# Allegro board BBSOLARCONTROLLER_V3000_IMPROVE_I.brd
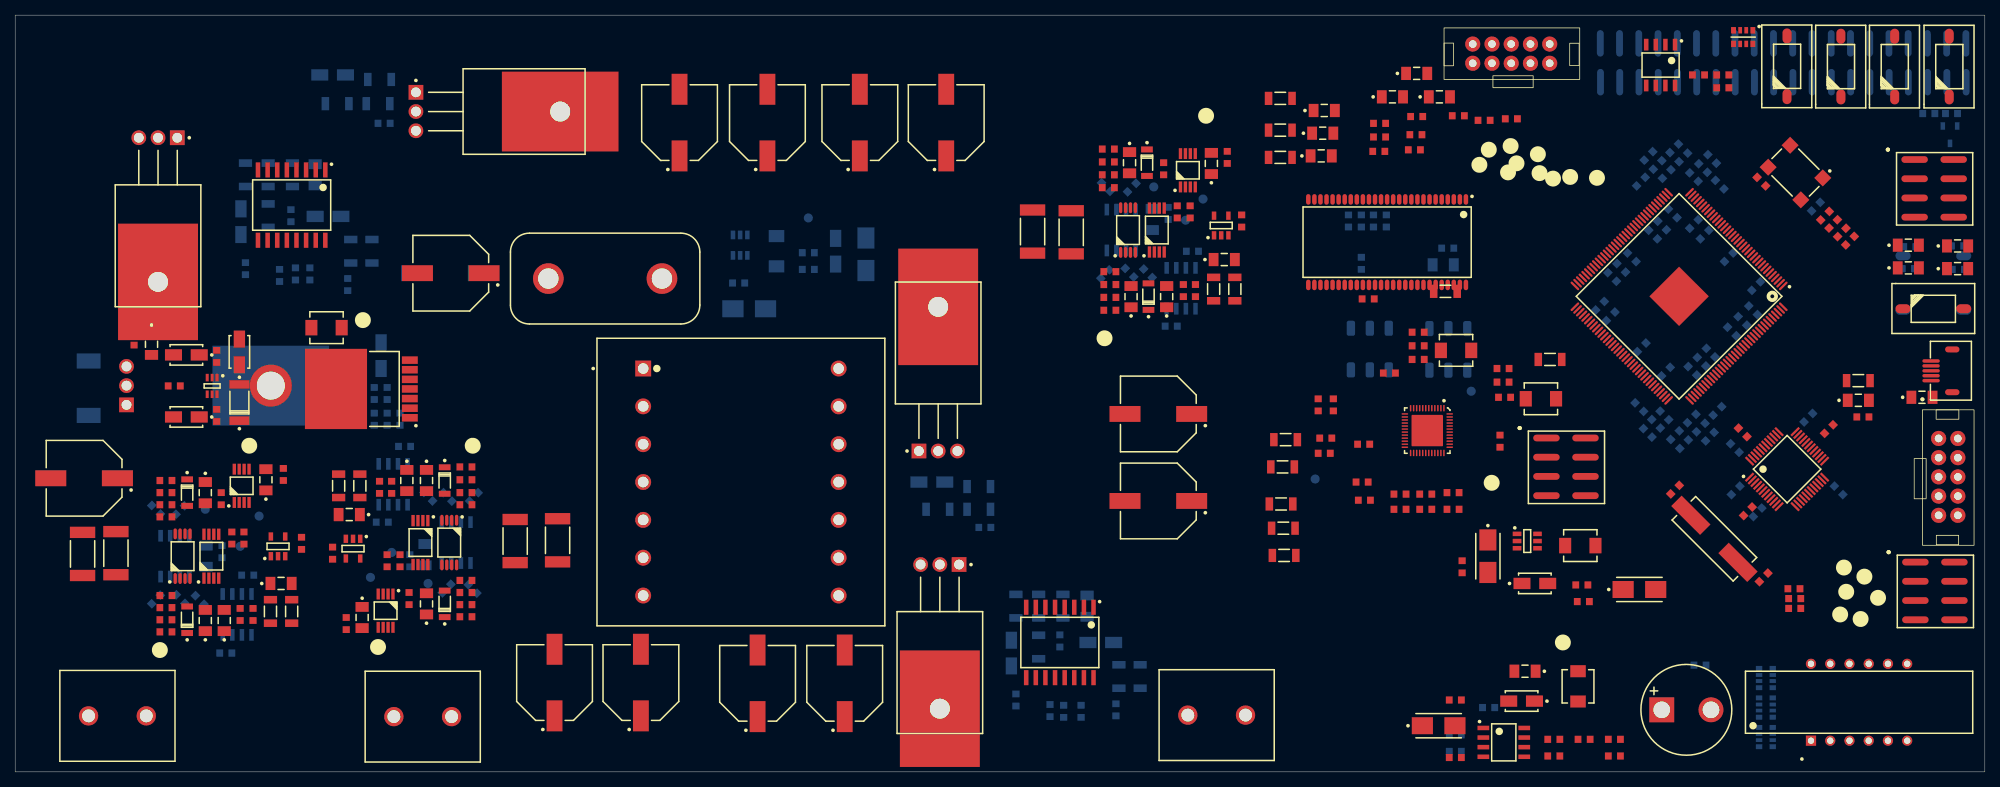
[diagram p0: board, top side]
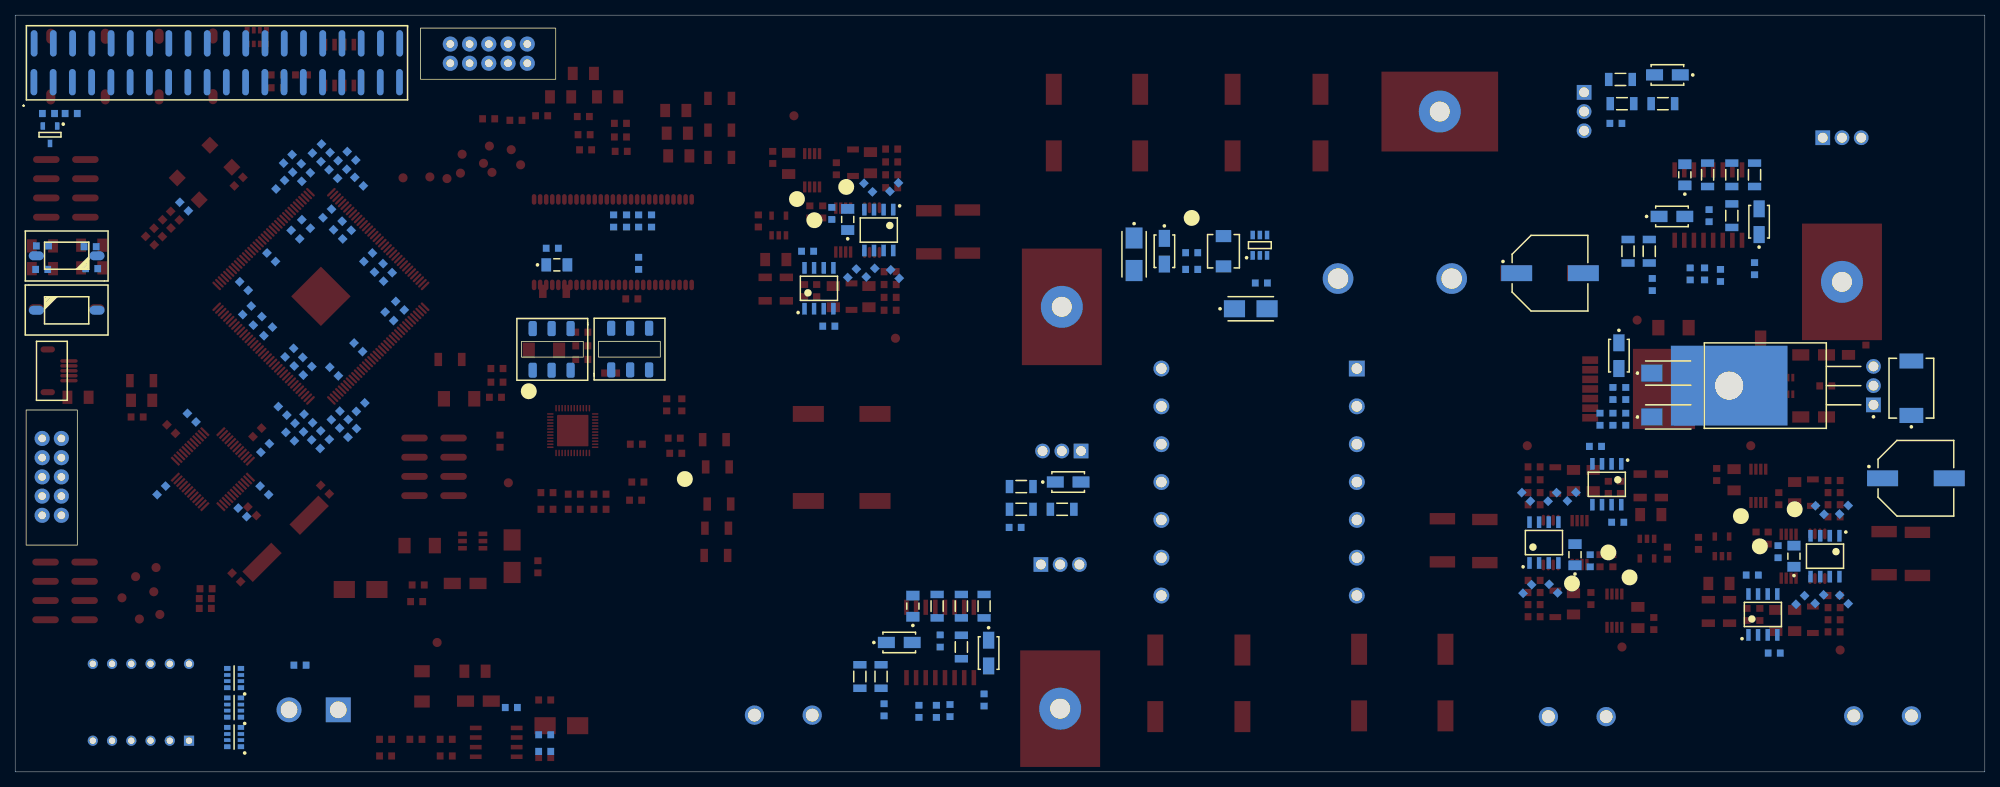
[diagram p1: board, bottom side, seen from below]

Outline 260 x 100 mm; copper layers: TOP, BOTTOM. Coordinates in mm from the lower left corner of the outline.
Outline path: 0,100 260,100 260,0 0,0 0,100

## Design rules (mm)
constraint set DEFAULT: min track width 0.25

## Placement (name value [footprint] x y rotation side)
BUTTON1  KEYA1  [BUTTON_2PIN]  250.2 70 0 bottom
BUTTON2  KEYA2  [BUTTON_2PIN]  256.2 59.2 180 bottom
BUTTON3  ARM_RST  [BUTTON_2PIN]  250.2 59.4 0 top
CA1  22pf  [CAP_NPO_0603]  219.1 37.3 45 top
CA2  22pf  [CAP_NPO_0603]  230.8 25.7 45 top
CA3  10UF  [TCAP_PO_1206]  251.7 49.5 0 top
CA4  10UF  [TCAP_PO_1206]  243.3 49.1 0 top
CA5  0.1uF  [CAP_NPO_0603]  243.9 46.9 180 top
CA6  100nf  [CAP_NPO_0603]  228.72 34.44 45 top
CA7  0.1uF  [CAP_NPO_0603]  236.7 46.8 45 bottom
CA8  0.1uF  [CAP_NPO_0603]  240.7 37.2 315 bottom
CA9  0.1uF  [CAP_NPO_0603]  230 34.3 225 bottom
CA10  4.7uF  [CAP_NPO_0603]  227.1 37.2 225 bottom
CA11  0.1uF  [CAP_NPO_0603]  227 42.8 135 bottom
CAXP1  100u/16V/6032  [TCAP_PO_6032]  194.4 28.5 270 top
CAXP2  1u  [CAP_NPO_0603]  191 27.1 270 top
CAXP3  100u/16V/6032  [TCAP_PO_6032]  214.4 24.1 0 top
CAXP4  10u  [CAP_NPO_0603]  185.2 56.3 0 top
CAXP5  0.22u/0603  [CAP_NPO_0603]  189.8 36.9 0 top
CAXP6  10u/16V/0603  [CAP_NPO_0603]  189.8 34.7 0 top
CAXP7  100n  [CAP_NPO_0603]  185.2 58.1 0 top
CAXP8  2.2u  [CAP_NPO_0603]  185.2 54.5 0 top
CAXP9  4.7u/0603  [CAP_NPO_0603]  186.2 34.7 0 top
CAXP10  4.7u/0603  [CAP_NPO_0603]  182.8 34.7 0 top
CAXP11  2.2u  [CAP_NPO_0603]  196.6 49.5 0 top
CAXP12  10u  [CAP_NPO_0603]  196.4 51.5 0 top
CAXP13  1n  [CAP_NPO_0603]  196.4 53.3 0 top
CAXP14  4.7u  [CAP_NPO_0603]  172 48.5 90 top
CAXP15  1u  [CAP_NPO_0603]  174 48.5 270 top
CAXP16  4.7u  [CAP_NPO_0603]  173 44.1 0 top
CAXP17  4.7u  [CAP_NPO_0603]  178.6 62.5 0 top
CAXP18  4.7u  [CAP_NPO_0603]  172.8 42.1 0 top
CAXP19  1u  [CAP_NPO_0603]  181.4 52.7 0 top
CAXP20  1u  [CAP_NPO_0603]  196 43.7 270 top
CAXP21  1u  [CAP_NPO_0603]  177.8 38.3 0 top
CBAT1  470u/35v  [SMD_AL_CAP_100X102]  57.4 65.9 180 bottom
CBAT2  470u/35v  [SMD_AL_CAP_100X102]  57.5 65.9 180 top
CBS1  1u  [CAP_NPO_0603]  48.1 37.6 270 top
CBS2  1u  [CAP_NPO_0603]  51.4 43.01 0 bottom
CBS3  100n  [CAP_NPO_0603]  49.7 37.6 90 top
CBS4  1u  [CAP_NPO_0603]  48.46 32.99 180 bottom
CBS5  10UF  [TCAP_PO_1206]  51.7 38.5 270 top
CBS6  0.1uF  [TCAP_PO_1206]  54.3 38.5 270 top
CBS7  0.1uF  [TCAP_PO_1206]  54.3 22.2 90 top
CBS8  10n  [CAP_NPO_0603]  41.9 28.9 90 top
CBS9  0.1uF  [TCAP_PO_1206]  44.1 34 180 top
CBS10  10UF  [TCAP_PO_1206]  54.1 28.7 90 bottom
CBS11  10n  [CAP_NPO_0603]  52.1 27.9 270 bottom
CBS12  10n  [CAP_NPO_0603]  43.7 19.6 270 top
CBS13  10UF  [TCAP_PO_1206]  45.8 20.4 270 top
CBS14  100n  [CAP_NPO_0603]  49.1 27.9 270 top
CF1  0.1uF  [CAP_NPO_0603]  213.4 68 315 bottom
CF2  0.1uF  [CAP_NPO_0603]  210.8 65.4 315 bottom
CF3  0.1uF  [CAP_NPO_0603]  216.2 71 315 bottom
CF4  0.1uF  [CAP_NPO_0603]  218.8 73.8 315 bottom
CF5  0.1uF  [CAP_NPO_0603]  223 71 225 bottom
CF6  0.1uF  [CAP_NPO_0603]  226.2 68 225 bottom
CF7  0.1uF  [CAP_NPO_0603]  229.4 61 135 bottom
CF8  0.1uF  [CAP_NPO_0603]  226.6 58.2 135 bottom
CF9  0.1uF  [CAP_NPO_0603]  223.8 55.4 135 bottom
CF10  0.1uF  [CAP_NPO_0603]  222.6 54.2 135 bottom
CF11  0.1uF  [CAP_NPO_0603]  214.7 56.1 45 bottom
CF12  0.1uF  [CAP_NPO_0603]  210.6 60.2 45 bottom
CF13  0.1uF  [CAP_NPO_0603]  212 66.6 315 bottom
CF14  0.1uF  [CAP_NPO_0603]  217.4 72.2 315 bottom
CF15  0.1uF  [CAP_NPO_0603]  221.6 72.4 225 bottom
CF16  0.1uF  [CAP_NPO_0603]  229.8 64.2 45 bottom
CF17  0.1uF  [CAP_NPO_0603]  228 59.6 135 bottom
CF18  0.1uF  [CAP_NPO_0603]  221.4 53 135 bottom
CF19  0.1uF  [CAP_NPO_0603]  217.9 52.9 45 bottom
CF20  0.1uF  [CAP_NPO_0603]  209.2 61.6 45 bottom
CF21  10UF  [TCAP_PO_1206]  181.8 89.2 0 top
CF22  0.1uF  [CAP_NPO_0603]  185 86.6 0 top
CF23  10UF  [TCAP_PO_1206]  185 92.3 0 top
CF24  0.1uF  [CAP_NPO_0603]  184.7 82.2 0 top
CF25  0.1uF  [CAP_NPO_0603]  184.9 84.2 0 top
CF26  0.1uF  [CAP_NPO_0603]  189.1 69.2 0 bottom
CF27  10UF  [TCAP_PO_1206]  188 89.2 0 top
CF28  10UF  [TCAP_PO_1206]  188.5 67 180 bottom
CF29  0.1uF  [CAP_NPO_0603]  215.6 81.4 45 bottom
CF30  0.1uF  [CAP_NPO_0603]  218 79 45 bottom
CF31  0.01uf  [CAP_NPO_0603]  216.8 80.2 45 bottom
CF32  0.1uF  [CAP_NPO_0603]  224 81 135 bottom
CF33  0.1uF  [CAP_NPO_0603]  222.8 79.8 135 bottom
CF34  0.01uf  [CAP_NPO_0603]  221.6 78.6 135 bottom
CF35  0.1uF  [CAP_NPO_0603]  242.2 70.2 45 top
CF36  0.1uF  [CAP_NPO_0603]  238.9 73.5 45 top
CF37  0.01uf  [CAP_NPO_0603]  237.7 74.7 45 bottom
CF38  0.1uF  [CAP_NPO_0603]  223.7 44.3 225 bottom
CF39  0.1uF  [CAP_NPO_0603]  222.5 45.5 225 bottom
CF40  0.01uf  [CAP_NPO_0603]  221.3 46.7 225 bottom
CF41  0.1uF  [CAP_NPO_0603]  215.5 44.8 315 bottom
CF42  0.1uF  [CAP_NPO_0603]  216.6 46 315 bottom
CF43  0.01uf  [CAP_NPO_0603]  217.7 47.1 315 bottom
CID1  10u  [TCAP_PO_1206]  18 56.5 270 top
CID2  100n  [CAP_NPO_0603]  15.7 57.2 270 top
CLOAD1  470u/35v  [SMD_AL_CAP_100X102]  150.9 47.3 180 top
CLOAD2  470u/35v  [SMD_AL_CAP_100X102]  150.9 35.8 180 top
CLS1  1u  [CAP_NPO_0603]  155.8 63.6 270 top
CLS2  100n  [CAP_NPO_0603]  154.2 63.6 90 top
CLS3  1u  [CAP_NPO_0603]  152.6 58.9 180 bottom
CLS4  10UF  [TCAP_PO_1206]  152 62.8 90 top
CLS5  1u  [CAP_NPO_0603]  155.4 68.8 0 bottom
CLS6  0.1uF  [TCAP_PO_1206]  147.3 62.8 90 top
CLS7  0.1uF  [TCAP_PO_1206]  147.1 80.5 270 top
CLS8  10n  [CAP_NPO_0603]  161.9 72.8 270 top
CLS9  0.1uF  [TCAP_PO_1206]  159.6 67.7 0 top
CLS10  10UF  [TCAP_PO_1206]  150.1 73 90 bottom
CLS11  10n  [CAP_NPO_0603]  152.2 73.8 270 bottom
CLS12  10n  [CAP_NPO_0603]  160 81.2 90 top
CLS13  10UF  [TCAP_PO_1206]  157.9 80.4 90 top
CLS14  100n  [CAP_NPO_0603]  155.1 74 90 top
CMDA1  10u/35V/6032  [TCAP_PO_6032]  96.9 61.2 180 bottom
CMDA2  0.1u/50V/0603  [CAP_NPO_0603]  95.5 64.6 180 bottom
CMDA3  10u/35V/6032  [TCAP_PO_6032]  112.3 68.4 270 bottom
CMDB1  100u/6032  [TCAP_PO_6032]  41.8 46.9 180 bottom
CMDB2  0.1u/50V/0603  [CAP_NPO_0603]  39.5 49.8 180 bottom
CMDB3  100u/6032  [TCAP_PO_6032]  41.8 52.7 180 bottom
CMDB4  0.047u  [CAP_NPO_0603]  47.4 46.6 90 bottom
CMDB5  0.0047u  [CAP_NPO_0603]  50.8 46.6 270 bottom
CMDR_B1  0.22u  [TCAP_PO_1206]  141.5 21.9 90 bottom
CMDR_B2  0.22u  [RCL_COM_1206]  138.3 21.9 270 bottom
CMDR_B3  100n  [CAP_NPO_0603]  145.3 8.2 270 bottom
CMDR_B4  100n  [CAP_NPO_0603]  132.1 9.5 270 bottom
CMDR_F1  0.22u  [TCAP_PO_1206]  39.6 78.9 90 bottom
CMDR_F2  0.22u  [RCL_COM_1206]  36.6 78.9 270 bottom
CMDR_F3  100n  [CAP_NPO_0603]  43.9 64.4 270 bottom
CMDR_F4  100n  [CAP_NPO_0603]  30.4 66.5 270 bottom
CP1  0.1uF/0603  [CAP_NPO_0603]  194.5 8.5 180 bottom
CP2  47uF/1206  [TCAP_PO_1206]  199.3 13.3 180 top
CP3  0.01uF/0603  [CAP_NPO_0603]  203.1 2.1 0 top
CP4  27pF/0603  [CAP_NPO_0603]  203.1 4.3 0 top
CP5  10u/35V/6032  [TCAP_PO_6032]  187.9 6.1 0 top
CP6  0.1uF/50V/0603  [CAP_NPO_0603]  190.1 9.5 0 top
CP7  0.015uF/0603  [CAP_NPO_0603]  190.1 1.9 180 top
CPV1  220u/50v  [SMD_AL_CAP_100X102]  9.1 38.8 180 bottom
CPV2  220u/50v  [SMD_AL_CAP_100X102]  9.1 38.8 180 top
CPVS1  1u  [CAP_NPO_0603]  31.4 20.8 90 top
CPVS2  100n  [CAP_NPO_0603]  29.7 20.8 270 top
CPVS3  1u  [CAP_NPO_0603]  27.8 15.7 180 bottom
CPVS4  10UF  [TCAP_PO_1206]  27.6 20 90 top
CPVS5  1u  [CAP_NPO_0603]  30.7 26 0 bottom
CPVS6  0.1uF  [TCAP_PO_1206]  25.1 20 90 top
CPVS7  0.1uF  [TCAP_PO_1206]  25.1 36.9 270 top
CPVS8  10n  [CAP_NPO_0603]  37.8 30.2 270 top
CPVS9  10UF  [TCAP_PO_1206]  35.1 24.9 0 top
CPVS10  10UF  [TCAP_PO_1206]  25.2 28.5 90 bottom
CPVS11  10n  [CAP_NPO_0603]  27.3 29.1 270 bottom
CPVS12  10n  [CAP_NPO_0603]  35.4 39.3 270 top
CPVS13  10UF  [TCAP_PO_1206]  33.1 38.6 90 top
CPVS14  100n  [CAP_NPO_0603]  30.2 30.9 270 top
CTR_B1  470u/35v  [SMD_AL_CAP_100X102]  111.5 85.8 90 top
CTR_B2  470u/35v  [SMD_AL_CAP_100X102]  122.9 85.8 90 top
CTR_B3  470u/35v  [SMD_AL_CAP_100X102]  109.5 11.7 90 top
CTR_B4  470u/35v  [SMD_AL_CAP_100X102]  98 11.7 90 top
CTR_F1  470u/35v  [SMD_AL_CAP_100X102]  87.7 85.8 90 top
CTR_F2  470u/35v  [SMD_AL_CAP_100X102]  99.3 85.8 90 top
CTR_F3  470u/35v  [SMD_AL_CAP_100X102]  82.6 11.8 90 top
CTR_F4  470u/35v  [SMD_AL_CAP_100X102]  71.2 11.8 90 top
DAXP1  B340A/SMA  [DIODE_SMA]  200.6 24.9 0 top
DBS1  1N4733  [SMA_1N4733_350_145]  56.7 38.5 270 top
DBS2  1N4733  [SMA_1N4733_350_145]  56.7 22.2 90 top
DID1  B340A  [DIODE_SMA]  22.6 46.9 180 top
DID2  B340A  [DIODE_SMA]  22.6 55.1 180 top
DID3  1N4744A  [SMA_1N4733_520_270]  29.6 48.8 90 top
DID4  B340A  [DIODE_SMA]  29.6 55.5 90 top
DID5  MBR2045  [DIODE_SMC]  9.7 50.7 90 bottom
DLA1  LED  [TCAP_PO_1206]  256.4 69.5 0 top
DLA2  LED  [TCAP_PO_1206]  256.4 66.5 0 top
DLF1  LED  [TCAP_PO_1206]  249.9 69.6 0 top
DLF2  LED  [TCAP_PO_1206]  249.9 66.6 0 top
DLS1  1N4733  [SMA_1N4733_350_145]  149.6 62.8 90 top
DLS2  1N4733  [SMA_1N4733_350_145]  149.4 80.5 270 top
DMDA1  B340A/SMA  [DIODE_SMA]  108.3 68.8 270 bottom
DMDB1  B340A/SMA  [DIODE_SMA]  48.3 55 270 bottom
DMDR_B1  B340A  [DIODE_SMA]  143.3 17.1 180 bottom
DMDR_F1  B340A  [DIODE_SMA]  41.3 73.4 180 bottom
DP1  B340A/SMA  [DIODE_SMA]  198.85 9.35 180 top
DPVS1  1N4733  [SMA_1N4733_350_145]  22.7 20.1 90 top
DPVS2  1N4733  [SMA_1N4733_350_145]  22.7 36.9 270 top
DTR_B1  B340A  [DIODE_SMA]  131.5 15.7 270 bottom
DTR_B2  B340A  [DIODE_SMA]  121 38.3 180 bottom
DTR_F1  B340A  [DIODE_SMA]  29.8 72.7 90 bottom
DTR_F2  B340A  [DIODE_SMA]  41.9 92.1 0 bottom
FB1  1uH  [RCL_COM_1206]  33.7 21.2 90 top
FB2  1uH  [RCL_COM_1206]  45.5 37.8 270 top
FB3  1uH  [RCL_COM_1206]  158.2 63.8 90 top
FB4  1uH  [RCL_COM_1206]  243.3 51.7 0 top
FB5  1uH  [RCL_COM_1206]  167 81.2 0 top
FB6  1uH  [RCL_COM_1206]  167 84.8 0 top
FB7  1uH  [RCL_COM_1206]  167 89 0 top
FB8  1u  [RCL_COM_1206]  44.3 68.8 270 bottom
FB9  1u  [RCL_COM_1206]  145.7 12.6 270 bottom
J1  ARM_JTAG  [JTAG_10PIN_DIP]  253.9 33.9 0 top
J2  MICRO USB  [MICROUSB]  258.3 49.3 90 top
J3  ARM_EXTEN_PIN  [SMD_8PIN_JACK]  252.1 20.1 0 top
J4  AXP_ENTEN_LDO  [SMD_8PIN_JACK]  203.4 36.5 0 top
J5  PV  [PV_BAT_LOAD_CONNECTOR_2P_762]  13.5 7.4 0 top
J6  Load  [PV_BAT_LOAD_CONNECTOR_2P_762]  158.6 7.5 0 top
J7  Bat  [PV_BAT_LOAD_CONNECTOR_2P_762]  53.8 7.3 0 top
J8  PROGRAM_SET  [SMD_40PIN_JACK]  257.5 95 270 bottom
J9  FPGA_JTAG  [JTAG_10PIN_DIP]  202.56 93.64 90 top
J10  FPGA_EXTEN_PIN  [SMD_8PIN_JACK]  252 73.3 0 top
KEYF1  BUTTON  [BUTTON_2PIN]  235.69 90.24 90 top
KEYF2  BUTTON  [BUTTON_2PIN]  249.9 90.2 90 top
KEYF3  BUTTON  [BUTTON_2PIN]  242.8 90.2 90 top
KEYF4  BUTTON  [BUTTON_2PIN]  257.1 90.2 90 top
LAXP1  2.2u/0420  [INDUCTOR_0420_H2]  206.6 29.9 0 top
LAXP2  4.7u/0420  [INDUCTOR_0420_H2]  190.2 55.7 0 top
LAXP3  2.2u/0420  [INDUCTOR_0420_H2]  201.4 49.3 0 top
LED1.2V1  LED  [TCAP_PO_1206]  172.4 81.4 0 top
LED2.5V1  LED  [TCAP_PO_1206]  172.6 84.4 0 top
LED3.3V1  LED  [TCAP_PO_1206]  172.8 87.4 0 top
LF1  47nH  [CAP_NPO_0603]  214.6 78 45 bottom
LF2  47nH  [CAP_NPO_0603]  225 77.6 135 bottom
LF3  47nH  [CAP_NPO_0603]  219 82.4 225 bottom
LF4  47nH  [CAP_NPO_0603]  220.2 81.2 45 bottom
LF5  47nH  [CAP_NPO_0603]  240 71.3 135 top
LF6  47nH  [CAP_NPO_0603]  224.7 47.7 225 bottom
LF7  47nH  [CAP_NPO_0603]  214.4 48.2 315 bottom
LF8  47nH  [CAP_NPO_0603]  241.1 72.4 135 top
LF9  47nH  [CAP_NPO_0603]  220.3 43.3 45 bottom
LF10  47nH  [CAP_NPO_0603]  219.1 44.5 225 bottom
LMDA1  4.7u/0420  [INDUCTOR_0420_H2]  100.5 68.8 270 bottom
LMDB1  4.7u/0420  [INDUCTOR_0420_H2]  41.1 58.7 0 top
LP1  15uH/0420  [INDUCTOR_0420_H2]  206.3 11.3 90 top
MB1  IRF3205  [IRF3205_TO220AB-3P]  124.6 27.4 270 top
MB2  IRF3205  [IRF3205_TO220AB-3P]  119.3 42.4 90 top
MF1  IRF3205  [IRF3205_TO220AB-3P]  21.4 83.8 270 top
MF2  IRF3205  [IRF3205_TO220AB-3P]  52.9 89.8 0 top
MID1  IRF3207  [IRF3205_TO220AB-3P#2]  14.7 48.5 0 bottom
P1  EP4CE6E144  [EP4CE6E144QFP-145N]  219.64 62.84 225 top
PV_BAT_L1  15u  [INDUCTOR_ROUND_250_150_120-2N]  77.88 65.19 0 top
QF1  8050  [SS8050_SOT23-3-3N]  255.4 84.2 270 bottom
RA1  2.2k  [CAP_NPO_0603]  234.8 24.2 0 top
RA2  2.2k  [CAP_NPO_0603]  234.9 22.9 0 top
RA3  2.2k  [CAP_NPO_0603]  234.9 21.6 0 top
RA4  1.5K  [CAP_NPO_0603]  239.4 45.3 225 top
RA5  10k  [CAP_NPO_0603]  228.04 44.86 315 top
RBS1  100K  [CAP_NPO_0603]  59.5 36.9 180 top
RBS2  100K  [CAP_NPO_0603]  59.5 23.7 180 top
RBS3  10k  [CAP_NPO_0603]  59.5 35.3 180 top
RBS4  10K/0603/LowPPM  [CAP_NPO_0603]  59.5 40.3 180 top
RBS5  10k  [CAP_NPO_0603]  59.5 25.3 0 top
RBS6  100K/0603/LowPPM  [CAP_NPO_0603]  59.5 38.6 180 top
RBS7  100K/0603/LowPPM  [CAP_NPO_0603]  59.5 22.1 180 top
RBS8  10K/0603/LowPPM  [CAP_NPO_0603]  59.5 20.5 180 top
RBS9  SC_AMP  [CAP_NPO_0603]  52 22.9 90 top
RBS10  REF_EN  [CAP_NPO_0603]  60.55 36.34 225 bottom
RBS11  REF_VCC  [CAP_NPO_0603]  57.09 36.33 315 bottom
RBS12  REF_GND  [CAP_NPO_0603]  60.39 24.17 135 bottom
RBS13  REF_EN  [CAP_NPO_0603]  56.95 24.22 225 bottom
RBS14  SC_IC  [CAP_NPO_0603]  54.54 36.36 315 bottom
RBS15  AD_BAT_GND  [RCL_COM_1206]  42.7 37.8 270 top
RBS16  6.8K  [CAP_NPO_0603]  50.8 27.9 270 top
RBS17  0.01  [SAMPLE_RESISTOR_2512]  66 30.5 270 top
RBS18  0.01  [SAMPLE_RESISTOR_2512]  71.6 30.6 270 top
RF1  1k  [CAP_NPO_0603]  256.4 69.5 180 bottom
RF2  1k  [CAP_NPO_0603]  256.5 66.4 180 bottom
RF3  4.7K  [CAP_NPO_0603]  222.2 92.1 0 top
RF4  4.7K  [CAP_NPO_0603]  225.4 90.4 180 top
RF5  4.7K  [CAP_NPO_0603]  225.4 92.1 180 top
RF6  2K  [CAP_NPO_0603]  255.6 87 0 bottom
RF7  100  [CAP_NPO_0603]  252.6 87 0 bottom
RF8  4.7K  [CAP_NPO_0603]  190.5 86.7 0 top
RF9  4.7K  [CAP_NPO_0603]  193.9 86.1 0 top
RF10  10k  [CAP_NPO_0603]  180.1 85.7 0 top
RF11  4.7K  [CAP_NPO_0603]  197.5 86.3 0 top
RF12  7.57K  [CAP_NPO_0603]  180.1 83.9 0 top
RF13  3.63K  [CAP_NPO_0603]  180 82 0 top
RF14  4.7K  [CAP_NPO_0603]  177.7 67.2 270 bottom
RF15  4.7K  [CAP_NPO_0603]  176 72.8 90 bottom
RF16  4.7K  [CAP_NPO_0603]  181 72.8 90 bottom
RF17  4.7K  [CAP_NPO_0603]  179.3 72.8 90 bottom
RF18  4.7K  [CAP_NPO_0603]  177.7 72.8 90 bottom
RF19  100  [CAP_NPO_0603]  222.4 14.1 0 bottom
RF20  1k  [CAP_NPO_0603]  249.9 66.5 180 bottom
RF21  1k  [CAP_NPO_0603]  250.1 69.4 180 bottom
RF22  22  [CAP_NPO_0603]  230.5 78 315 top
RID1  200  [CAP_NPO_0603]  26.6 47.1 270 top
RID2  2K  [CAP_NPO_0603]  21 51 0 top
RID3  200  [CAP_NPO_0603]  26.6 54.9 90 top
RLS1  100K  [CAP_NPO_0603]  144.5 64.4 0 top
RLS2  100K  [CAP_NPO_0603]  144.3 78.9 0 top
RLS3  10k  [CAP_NPO_0603]  144.5 66.1 0 top
RLS4  10k  [CAP_NPO_0603]  144.3 77.2 180 top
RLS5  10K/0603/LowPPM  [CAP_NPO_0603]  144.5 61 0 top
RLS6  100K/0603/LowPPM  [CAP_NPO_0603]  144.5 62.7 0 top
RLS7  100K/0603/LowPPM  [CAP_NPO_0603]  144.3 80.6 0 top
RLS8  10K/0603/LowPPM  [CAP_NPO_0603]  144.3 82.3 0 top
RLS9  SC_AMP  [CAP_NPO_0603]  151.6 79.7 270 top
RLS10  REF_EN  [CAP_NPO_0603]  143.87 65.78 45 bottom
RLS11  REF_VCC  [CAP_NPO_0603]  147.09 65.97 135 bottom
RLS12  REF_GND  [CAP_NPO_0603]  143.97 77.28 315 bottom
RLS13  REF_EN  [CAP_NPO_0603]  147.4 77.21 45 bottom
RLS14  SC_IC  [CAP_NPO_0603]  149.52 65.89 135 bottom
RLS15  AD_LOAD_GND  [RCL_COM_1206]  161 63.8 90 top
RLS16  6.8K  [CAP_NPO_0603]  153.4 74 90 top
RLS17  0.01  [SAMPLE_RESISTOR_2512]  134.3 71.4 90 top
RLS18  0.01  [SAMPLE_RESISTOR_2512]  139.4 71.3 90 top
RMDA1  100k/0603  [CAP_NPO_0603]  104.7 68.6 0 bottom
RMDA2  4k/0603  [CAP_NPO_0603]  104.7 66.4 180 bottom
RMDB1  56k/0603/1%  [CAP_NPO_0603]  47.4 50 90 bottom
RMDB2  2k/0603/1%  [CAP_NPO_0603]  49.1 50 270 bottom
RMDB3  2K  [CAP_NPO_0603]  49.1 46.6 90 bottom
RMDR_B1  4.7  [CAP_NPO_0603]  137.9 17.3 90 bottom
RMDR_B2  4.7  [CAP_NPO_0603]  136.6 8.1 90 bottom
RMDR_B3  4.7  [CAP_NPO_0603]  138.4 8 90 bottom
RMDR_B4  4.7  [CAP_NPO_0603]  140.7 8 90 bottom
RMDR_B5  GND_MDR_B  [RCL_COM_1206]  148.5 12.6 270 bottom
RMDR_B6  4.7  [CAP_NPO_0603]  128 32.3 0 bottom
RMDR_F1  4.7  [CAP_NPO_0603]  36.4 73.5 90 bottom
RMDR_F2  4.7  [CAP_NPO_0603]  34.9 65.6 90 bottom
RMDR_F3  4.7  [CAP_NPO_0603]  37 65.8 90 bottom
RMDR_F4  4.7  [CAP_NPO_0603]  38.9 65.8 90 bottom
RMDR_F5  GND_MDR_F  [RCL_COM_1206]  47.1 68.8 270 bottom
RMDR_F6  4.7  [CAP_NPO_0603]  48.7 85.7 180 bottom
RP1  10K/0603  [CAP_NPO_0603]  211.1 2.1 180 top
RP2  1.5K/0603  [CAP_NPO_0603]  211.1 4.3 0 top
RP3  50K/0603  [CAP_NPO_0603]  190.1 4.9 0 bottom
RP4  1K/0603  [CAP_NPO_0603]  190.1 2.7 180 bottom
RP5  20K/0603  [CAP_NPO_0603]  207.1 4.3 0 top
RPKEY1  KEY_1K  [RP_RESISTOR_ARRAY_0603-8N]  228.1 97.1 270 top
RPM1  BOOST  [RCL_COM_1206]  167.5 28.6 0 top
RPM2  106k  [CAP_NPO_0603]  206.8 24.7 0 top
RPM3  13k  [CAP_NPO_0603]  207 22.5 0 top
RPM4  BUCK  [RCL_COM_1206]  167.4 32.2 0 top
RPM5  PMIC  [RCL_COM_1206]  167.1 35.4 0 top
RPM6  2.2/0603  [CAP_NPO_0603]  186.2 36.7 0 top
RPM7  2.2/0603  [CAP_NPO_0603]  182.8 36.7 0 top
RPM8  0  [CAP_NPO_0603]  178 43.3 0 top
RPM9  0  [CAP_NPO_0603]  178.1 35.9 0 top
RPM10  AXP_GND  [RCL_COM_1206]  167.3 40.3 0 top
RPM11  FPGA_GND  [RCL_COM_1206]  188.8 63.5 0 top
RPM12  AXP_AGND  [RCL_COM_1206]  167.7 43.9 0 top
RPM13  ARM_GND  [RCL_COM_1206]  202.6 54.5 0 top
RPSEG1  1k  [RP_RESISTOR_ARRAY_0603-8N]  231.1 12.4 0 bottom
RPSEG2  1k  [RP_RESISTOR_ARRAY_0603-8N]  231.1 8.5 0 bottom
RPSEG3  1k  [RP_RESISTOR_ARRAY_0603-8N]  231.1 4.6 0 bottom
RPVS1  100K  [CAP_NPO_0603]  19.9 35.3 180 top
RPVS2  100K  [CAP_NPO_0603]  19.9 21.7 180 top
RPVS3  10k  [CAP_NPO_0603]  19.9 23.3 180 top
RPVS4  10k  [CAP_NPO_0603]  19.9 33.7 0 top
RPVS5  10K/0603/LowPPM  [CAP_NPO_0603]  19.9 18.5 0 top
RPVS6  100K/0603/LowPPM  [CAP_NPO_0603]  19.9 20.1 0 top
RPVS7  100K/0603/LowPPM  [CAP_NPO_0603]  19.9 36.9 0 top
RPVS8  10K/0603/LowPPM  [CAP_NPO_0603]  19.9 38.5 0 top
RPVS9  SC_AMP  [CAP_NPO_0603]  27.2 36.1 270 top
RPVS10  REF_EN  [CAP_NPO_0603]  18.59 22.78 45 bottom
RPVS11  REF_VCC  [CAP_NPO_0603]  21.84 22.83 135 bottom
RPVS12  REF_GND  [CAP_NPO_0603]  18.61 34.64 135 bottom
RPVS13  REF_EN  [CAP_NPO_0603]  21.79 34.6 45 bottom
RPVS14  SC_IC  [CAP_NPO_0603]  24.36 22.72 135 bottom
RPVS15  AD_PV_GND  [RCL_COM_1206]  36.5 21.2 90 top
RPVS16  6.8K  [CAP_NPO_0603]  28.6 30.9 270 top
RPVS17  0.01  [SAMPLE_RESISTOR_2512]  13.3 28.9 90 top
RPVS18  0.01  [SAMPLE_RESISTOR_2512]  8.9 28.8 90 top
RTR_B1  4.7  [RCL_COM_1206]  135.1 16.5 270 bottom
RTR_B2  4.7  [RCL_COM_1206]  135.1 21.9 90 bottom
RTR_B3  47K  [RCL_COM_1206]  132.1 21.9 270 bottom
RTR_B4  4.7  [RCL_COM_1206]  121.8 34.7 180 bottom
RTR_B5  4.7  [RCL_COM_1206]  127.2 34.7 180 bottom
RTR_B6  4.7  [RCL_COM_1206]  127.2 37.7 180 bottom
RTR_F1  4.7  [RCL_COM_1206]  33.4 73.5 270 bottom
RTR_F2  4.7  [RCL_COM_1206]  33.4 78.9 90 bottom
RTR_F3  47K  [RCL_COM_1206]  30.4 78.9 90 bottom
RTR_F4  4.7  [RCL_COM_1206]  42.5 88.3 180 bottom
RTR_F5  4.7  [RCL_COM_1206]  47.9 88.3 0 bottom
RTR_F6  47K  [RCL_COM_1206]  48.1 91.5 0 bottom
SW1  N_OE  [SWITCH_6PIN]  183.4 54.1 180 bottom
SW2  N_OE  [SWITCH_6PIN]  184.6 57.6 0 bottom
T1  ETD29_TRAN  [ETD29_L_14P_DIP]  95.8 38.3 0 top
TEST_POINT1  PV_2.5V  [TESTPOINT120]  25.1 34.7 270 bottom
TEST_POINT2  BAT_2.5V  [TESTPOINT120]  54.5 24.9 90 bottom
TEST_POINT3  PV_2.5V_TRIM  [TESTPOINT120]  29.7 29.8 270 bottom
TEST_POINT4  BAT_2.5V_TRIM  [TESTPOINT120]  49.7 29 90 bottom
TEST_POINT5  PV_1V  [TESTPOINT120]  19.1 16.1 90 top
TEST_POINT6  BAT_1V  [TESTPOINT120]  60.4 43.1 270 top
TEST_POINT7  PV_AD2  [TESTPOINT120]  32.2 33.8 270 bottom
TEST_POINT8  PV_AD1  [TESTPOINT120]  30.9 43.1 90 top
TEST_POINT9  BAT_AD2  [TESTPOINT120]  46.9 25.7 90 bottom
TEST_POINT10  BAT_AD1  [TESTPOINT120]  47.9 16.5 270 top
TEST_POINT11  LOAD_2.5V  [TESTPOINT120]  150.3 77.3 270 bottom
TEST_POINT12  LOAD_2.5V_TRIM  [TESTPOINT120]  154.5 72.9 270 bottom
TEST_POINT13  LOAD_1V  [TESTPOINT120]  143.8 57.3 90 top
TEST_POINT14  LOAD_AD2  [TESTPOINT120]  156.8 75.7 270 bottom
TEST_POINT15  LOAD_AD1  [TESTPOINT120]  157.2 86.7 90 top
TEST_POINT16  ARM_TXD  [TESTPOINT120]  244.1 25.8 0 top
TEST_POINT17  ARM_RXD  [TESTPOINT120]  241.4 27 0 top
TEST_POINT18  SPI_NSS  [TESTPOINT120]  241.7 23.8 0 top
TEST_POINT19  SPI_SCK  [TESTPOINT120]  245.9 23 0 top
TEST_POINT20  SPI_MISO  [TESTPOINT120]  243.6 20.2 0 top
TEST_POINT21  SPI_MOSI  [TESTPOINT120]  240.9 20.8 0 top
TEST_POINT22  AMP_5V  [TESTPOINT120]  194.9 38.2 0 top
TEST_POINT23  BAT_6V  [TESTPOINT120]  204.3 17.1 0 top
TEST_POINT24  MDR_15V  [TESTPOINT120]  104.7 73.2 180 bottom
TEST_POINT25  EXTEN  [TESTPOINT120]  171.6 38.7 180 bottom
TEST_POINT26  PEK  [TESTPOINT120]  192.2 50.3 180 bottom
TEST_POINT27  MDR_35V  [TESTPOINT120]  45.9 59.7 90 top
TEST_POINT28  AD_BAT_DOUT  [TESTPOINT120]  201.22 79.12 0 top
TEST_POINT29  AD_BAT_SCLK  [TESTPOINT120]  198.18 80.42 0 top
TEST_POINT30  AD_BAT_DIN  [TESTPOINT120]  201 81.62 0 top
TEST_POINT31  AD_BAT_CS  [TESTPOINT120]  197.06 79.22 0 top
TEST_POINT32  Q3/4_SD  [TESTPOINT120]  197.4 82.7 0 top
TEST_POINT33  Q1/2_SD  [TESTPOINT120]  203 78.4 0 top
TEST_POINT34  Q1_PWM  [TESTPOINT120]  193.28 80.22 0 top
TEST_POINT35  Q2_PWM  [TESTPOINT120]  205.26 78.62 0 top
TEST_POINT36  Q3_PWM  [TESTPOINT120]  194.52 82.22 0 top
TEST_POINT37  Q4_PWM  [TESTPOINT120]  208.8 78.5 0 top
U1  AD780  [AD780SOIC_N-8N]  29.3 20.8 90 bottom
U2  AD780  [AD780SOIC_N-8N]  49.9 38 270 bottom
U3  LM358  [LM358TSSOP-8N]  22.1 28.5 90 top
U4  LM358  [LM358TSSOP-8N]  57.3 30.3 270 top
U5  TPS73150  [TPS73150SOT23_5_FINAL]  34.7 29.8 90 top
U6  TPS73150  [TPS73150SOT23_5_FINAL]  44.6 29.5 270 top
U7  AD8210  [AD8210SOIC_N-8N]  21.1 28.5 270 bottom
U8  AD8210  [AD8210SOIC_N-8N]  58.2 30.3 90 bottom
U9  ADC122S101  [ADC122S101VSSOP-8N]  29.9 37.8 90 top
U10  LM385  [LM385TSSOP-8N]  25.9 28.5 90 top
U11  ADC122S101  [ADC122S101VSSOP-8N]  48.9 21.3 270 top
U12  LM385  [LM385TSSOP-8N]  53.5 30.3 270 top
U13  AD780  [AD780SOIC_N-8N]  153.9 63.9 90 bottom
U14  LM358  [LM358TSSOP-8N]  146.9 71.6 90 top
U15  AD8210  [AD8210SOIC_N-8N]  146 71.6 270 bottom
U16  TPS73150  [TPS73150SOT23_5_FINAL]  159.2 72.2 90 top
U17  ADC122S101  [ADC122S101VSSOP-8N]  154.8 79.5 90 top
U18  LM385  [LM385TSSOP-8N]  150.7 71.6 90 top
U19  STM32C8T6  [STM32C8T6QFP-48N]  233.9 40 45 top
U20  sy7208  [SY7208_SOT23-6-6N]  199.6 30.5 0 top
U21  TPS54331  [AD780SOIC_N-8N]  196.5 3.9 0 top
U22  AXP209  [AXP209QFN-49N]  186.4 45.1 270 top
U23  sy7208  [SY7208_SOT23-6-6N]  95.7 69.6 90 bottom
U24  LT1371HV  [LT1371_DD_PAK_TO-8N]  45.7 50.6 180 top
U25  EPCS4SI8N  [AD780SOIC_N-8N]  217.2 93.4 270 top
U26  MT48LC16M16A2TG-75  [MT48LC16M16A275_TSOP-54N]  181.1 70 270 top
U27  4_8_SEG  [LEDSEG_DIP12_300_140_036INCH]  243.4 9.2 90 top
U28  SOUNDER  [PTH_BUZZER_2PIN]  220.6 8.2 0 top
U29  IR2110S_FORWARD  [IR2110_SOIC-16N]  36.5 74.9 270 top
U30  IR2110S_BACKWARD  [IR2110_SOIC-16N]  137.9 17.1 270 top
U31  BC847S  [BC847S_SOT-363_6N]  26 51 270 top
Y1  ARM_CRYSTAL  [8MHZYXC_HC49SMD]  224.3 30.8 315 top
Y2  FPGA_CRYSTAL  [YSO751SR_50MHZ_SMD-7050-4N]  235 79.2 225 top

## Library data of the parts
BUTTON1-BUTTON3 KEYF1-KEYF4 = SW PUSHBUTTON-SPST/SM_0
CA1 CA2 CA5-CA11 CAXP2 CAXP4-CAXP21 CBS8 CBS12 CF1-CF20 CF22 CF24-CF26 CF29-CF43 CID2 CLS8 CLS12 CMDA2 CMDB2 CMDB4 CMDB5 CMDR_B2-CMDR_B4 CMDR_F2-CMDR_F4 CP1-CP4 CP6 CP7 CPVS8 CPVS12 = CAP NP
CA3 CA4 CBS5-CBS7 CBS9 CBS10 CBS13 CF21 CF23 CF27 CF28 CLS4 CLS6 CLS7 CLS9 CLS10 CLS13 CPVS4 CPVS6 CPVS7 CPVS9 CPVS10 CPVS13 = CAP
CAXP1 CAXP3 CBAT1 CBAT2 CBS1-CBS4 CBS11 CBS14 CID1 CLOAD1 CLOAD2 CLS1-CLS3 CLS5 CLS11 CLS14 CMDA1 CMDA3 CMDB1 CMDB3 CMDR_B1 CMDR_F1 CP5 CPV1 CPV2 CPVS1-CPVS3 CPVS5 CPVS11 CPVS14 CTR_B1-CTR_B4 CTR_F1-CTR_F4 = C
DAXP1 DID2 DID4 DMDA1 DMDB1 DMDR_B1 DMDR_F1 DP1 DTR_B1 DTR_B2 DTR_F1 DTR_F2 = DIODE SCHOTTKY
DBS1 DBS2 DID3 DLS1 DLS2 DPVS1 DPVS2 = 1N4744A
DID1 = DIODE SCHOTTKY_0
DID5 = DIODE_1
DLA1 DLA2 DLF1 DLF2 LED1.2V1 LED2.5V1 LED3.3V1 = LED
FB1-FB9 LAXP1-LAXP3 LF1-LF10 LMDA1 LMDB1 PV_BAT_L1 = INDUCTOR
J1 J9 = Header 5X2_5
J2 = MICROUSB_1
J3 = Header 5X2_4
J4 J10 = Header 5X2_2
J5 = PV_1
J6 = Load
J7 = Bat_0
J8 = 20Pin_Header
LP1 = INDUCTOR IRON
MB1 MB2 MF1 MF2 = MPF4150_0
MID1 = IRF1404_0
P1 = EP4CE6E144_7
QF1 = NPN BCE
RA1-RA3 RF3-RF9 RF11 RID1-RID3 RMDA1 RMDA2 RMDB1-RMDB3 RP1-RP5 RPM1-RPM13 = R
RA4 RA5 RBS1-RBS18 RF1 RF2 RF10 RF12-RF22 RLS1-RLS18 RMDR_B1-RMDR_B6 RMDR_F1-RMDR_F6 RPVS1-RPVS18 RTR_B1-RTR_B6 RTR_F1-RTR_F6 = RESISTOR
RPKEY1 RPSEG1-RPSEG3 = R-PACK_1
SW1 SW2 = SW_T_SPDT_3
T1 = ETD29_TRAN_0
TEST_POINT1-TEST_POINT37 = TEST POINT
U1 U2 U13 = AD780
U3 U4 U14 = LM358-SingleChip
U5 U6 U16 = TPS73150_1
U7 U8 U15 = AD8210
U9 U11 U17 = ADC122S101
U10 U12 U18 = LM385
U19 = C8T6_0
U20 U23 = sy7208
U21 = TPS54331
U22 = AXP209
U24 = LT1371HV_0
U25 = EPCS4SI8N_0
U26 = MT48LC16M16A2TG-75_4
U27 = 4_8_SEG
U28 = SOUNDER
U29 U30 = IR2110S
U31 = BC847S
Y1 = CRYSTAL
Y2 = CRYSTAL1-4/SM

## Footprints (pads in the part's own frame, mm; a bottom-side part is the same pattern mirrored in y, then rotated)
8MHZYXC_HC49SMD
  rect 5.4x1.95 smd: 1(-4.4,0) 2(4.4,0)
AD780SOIC_N-8N
  rect 1.55x0.6 smd: 1(-2.7,1.905) 2(-2.7,0.635) 3(-2.7,-0.635) 4(-2.7,-1.905) 5(2.7,-1.905) 6(2.7,-0.635) 7(2.7,0.635) 8(2.7,1.905)
AD8210SOIC_N-8N
  rect 1.55x0.6 smd: 1(-2.7,1.905) 2(-2.7,0.635) 3(-2.7,-0.635) 4(-2.7,-1.905) 5(2.7,-1.905) 6(2.7,-0.635) 7(2.7,0.635) 8(2.7,1.905)
ADC122S101VSSOP-8N
  rect 1.45x0.45 smd: 1(-2.2,0.975) 2(-2.2,0.325) 3(-2.2,-0.325) 4(-2.2,-0.975) 5(2.2,-0.975) 6(2.2,-0.325) 7(2.2,0.325) 8(2.2,0.975)
AXP209QFN-49N
  custom 0.85x0.2 smd: 1(-2.95,2.2) 2(-2.95,1.8) 3(-2.95,1.4) 4(-2.95,1) 5(-2.95,0.6) 6(-2.95,0.2) 7(-2.95,-0.2) 8(-2.95,-0.6) 9(-2.95,-1) 10(-2.95,-1.4) 11(-2.95,-1.8) 12(-2.95,-2.2) 25(2.95,-2.2) 26(2.95,-1.8) 27(2.95,-1.4) 28(2.95,-1) 29(2.95,-0.6) 30(2.95,-0.2) 31(2.95,0.2) 32(2.95,0.6) 33(2.95,1) 34(2.95,1.4) 35(2.95,1.8) 36(2.95,2.2)
  custom 0.2x0.85 smd: 13(-2.2,-2.95) 14(-1.8,-2.95) 15(-1.4,-2.95) 16(-1,-2.95) 17(-0.6,-2.95) 18(-0.2,-2.95) 19(0.2,-2.95) 20(0.6,-2.95) 21(1,-2.95) 22(1.4,-2.95) 23(1.8,-2.95) 24(2.2,-2.95) 37(2.2,2.95) 38(1.8,2.95) 39(1.4,2.95) 40(1,2.95) 41(0.6,2.95) 42(0.2,2.95) 43(-0.2,2.95) 44(-0.6,2.95) 45(-1,2.95) 46(-1.4,2.95) 47(-1.8,2.95) 48(-2.2,2.95)
  custom 4.15x4.15 smd: 49(0,0)
BC847S_SOT-363_6N
  rect 1x0.4 smd: 1(-1.1,0.65) 2(-1.1,0) 3(-1.1,-0.65) 4(1.1,-0.65) 5(1.1,0) 6(1.1,0.65)
BUTTON_2PIN
  oval 2x1.2 smd: 1(-1,1.8) 2(7.01,1.803)
CAP_NPO_0603
  rect 0.9x0.95 smd: 1(-0.8,0) 2(0.8,0)
DIODE_SMA
  rect 2.25x1.5 smd: 1(1.7,0) 2(-1.7,0)
DIODE_SMC
  rect 2x3.15 smd: 1(3.6,0) 2(-3.6,0)
EP4CE6E144QFP-145N
  oval 1.5x0.3 smd: 1(-10.7,8.75) 2(-10.7,8.25) 3(-10.7,7.75) 4(-10.7,7.25) 5(-10.7,6.75) 6(-10.7,6.25) 7(-10.7,5.75) 8(-10.7,5.25) 9(-10.7,4.75) 10(-10.7,4.25) 11(-10.7,3.75) 12(-10.7,3.25) 13(-10.7,2.75) 14(-10.7,2.25) 15(-10.7,1.75) 16(-10.7,1.25) 17(-10.7,0.75) 18(-10.7,0.25) 19(-10.7,-0.25) 20(-10.7,-0.75) 21(-10.7,-1.25) 22(-10.7,-1.75) 23(-10.7,-2.25) 24(-10.7,-2.75) 25(-10.7,-3.25) 26(-10.7,-3.75) 27(-10.7,-4.25) 28(-10.7,-4.75) 29(-10.7,-5.25) 30(-10.7,-5.75) 31(-10.7,-6.25) 32(-10.7,-6.75) 33(-10.7,-7.25) 34(-10.7,-7.75) 35(-10.7,-8.25) 36(-10.7,-8.75) 73(10.7,-8.75) 74(10.7,-8.25) 75(10.7,-7.75) 76(10.7,-7.25) 77(10.7,-6.75) 78(10.7,-6.25) 79(10.7,-5.75) 80(10.7,-5.25) 81(10.7,-4.75) 82(10.7,-4.25) 83(10.7,-3.75) 84(10.7,-3.25) 85(10.7,-2.75) 86(10.7,-2.25) 87(10.7,-1.75) 88(10.7,-1.25) 89(10.7,-0.75) 90(10.7,-0.25) 91(10.7,0.25) 92(10.7,0.75) 93(10.7,1.25) 94(10.7,1.75) 95(10.7,2.25) 96(10.7,2.75) 97(10.7,3.25) 98(10.7,3.75) 99(10.7,4.25) 100(10.7,4.75) 101(10.7,5.25) 102(10.7,5.75) 103(10.7,6.25) 104(10.7,6.75) 105(10.7,7.25) 106(10.7,7.75) 107(10.7,8.25) 108(10.7,8.75)
  oval 0.3x1.5 smd: 37(-8.75,-10.7) 38(-8.25,-10.7) 39(-7.75,-10.7) 40(-7.25,-10.7) 41(-6.75,-10.7) 42(-6.25,-10.7) 43(-5.75,-10.7) 44(-5.25,-10.7) 45(-4.75,-10.7) 46(-4.25,-10.7) 47(-3.75,-10.7) 48(-3.25,-10.7) 49(-2.75,-10.7) 50(-2.25,-10.7) 51(-1.75,-10.7) 52(-1.25,-10.7) 53(-0.75,-10.7) 54(-0.25,-10.7) 55(0.25,-10.7) 56(0.75,-10.7) 57(1.25,-10.7) 58(1.75,-10.7) 59(2.25,-10.7) 60(2.75,-10.7) 61(3.25,-10.7) 62(3.75,-10.7) 63(4.25,-10.7) 64(4.75,-10.7) 65(5.25,-10.7) 66(5.75,-10.7) 67(6.25,-10.7) 68(6.75,-10.7) 69(7.25,-10.7) 70(7.75,-10.7) 71(8.25,-10.7) 72(8.75,-10.7) 109(8.75,10.7) 110(8.25,10.7) 111(7.75,10.7) 112(7.25,10.7) 113(6.75,10.7) 114(6.25,10.7) 115(5.75,10.7) 116(5.25,10.7) 117(4.75,10.7) 118(4.25,10.7) 119(3.75,10.7) 120(3.25,10.7) 121(2.75,10.7) 122(2.25,10.7) 123(1.75,10.7) 124(1.25,10.7) 125(0.75,10.7) 126(0.25,10.7) 127(-0.25,10.7) 128(-0.75,10.7) 129(-1.25,10.7) 130(-1.75,10.7) 131(-2.25,10.7) 132(-2.75,10.7) 133(-3.25,10.7) 134(-3.75,10.7) 135(-4.25,10.7) 136(-4.75,10.7) 137(-5.25,10.7) 138(-5.75,10.7) 139(-6.25,10.7) 140(-6.75,10.7) 141(-7.25,10.7) 142(-7.75,10.7) 143(-8.25,10.7) 144(-8.75,10.7)
  rect 5.55x5.55 smd: 145(0,0)
ETD29_L_14P_DIP
  rect 2.1x2.1 hole 1.4: 1(-12.9,15)
  round 2.1 hole 1.4: 2(-12.9,10) 3(-12.9,5) 4(-12.9,0) 5(-12.9,-5) 6(-12.9,-10) 7(-12.9,-15) 8(12.9,-15) 9(12.9,-10) 10(12.9,-5) 11(12.9,0) 12(12.9,5) 13(12.9,10) 14(12.9,15)
INDUCTOR_0420_H2
  rect 1.6x2.05 smd: 1(-2,0) 2(2,0)
INDUCTOR_ROUND_250_150_120-2N
  round 4.05 hole 2.7: 1(-7.5,0) 2(7.5,0)
IR2110_SOIC-16N
  rect 2x0.6 smd: 1(-4.65,4.445) 2(-4.65,3.175) 3(-4.65,1.905) 4(-4.65,0.635) 5(-4.65,-0.635) 6(-4.65,-1.905) 7(-4.65,-3.175) 8(-4.65,-4.445) 9(4.65,-4.445) 10(4.65,-3.175) 11(4.65,-1.905) 12(4.65,-0.635) 13(4.65,0.635) 14(4.65,1.905) 15(4.65,3.175) 16(4.65,4.445)
IRF3205_TO220AB-3P
  rect 1.95x1.95 hole 1.3: 1(0,0)
  round 1.95 hole 1.3: 2(0,-2.54) 3(0,-5.08)
  custom 15.4x10.55 hole 3.7: 4(19.05,-2.54)
IRF3205_TO220AB-3P#2
  rect 1.95x1.95 hole 1.3: 1(0,0)
  round 1.95 hole 1.3: 2(0,-2.54) 3(0,-5.08)
  round 5.55 hole 3.7: 4(19.05,-2.54)
JTAG_10PIN_DIP
  round 2 hole 1.02: 1(0,10.16) 2(2.54,10.16) 3(0,7.62) 4(2.54,7.62) 5(0,5.08) 6(2.54,5.08) 7(0,2.54) 8(2.54,2.54) 9(0,0) 10(2.54,0)
LEDSEG_DIP12_300_140_036INCH
  rect 1.35x1.35 hole 0.85: 1(-5.08,6.35)
  round 1.35 hole 0.85: 2(-5.08,3.81) 3(-5.08,1.27) 4(-5.08,-1.27) 5(-5.08,-3.81) 6(-5.08,-6.35) 7(5.08,-6.35) 8(5.08,-3.81) 9(5.08,-1.27) 10(5.08,1.27) 11(5.08,3.81) 12(5.08,6.35)
LM358TSSOP-8N
  oval 1.45x0.45 smd: 1(-2.95,0.975) 2(-2.95,0.325) 3(-2.95,-0.325) 4(-2.95,-0.975) 5(2.95,-0.975) 6(2.95,-0.325) 7(2.95,0.325) 8(2.95,0.975)
LM385TSSOP-8N
  rect 1.5x0.45 smd: 1(-2.9,0.975) 2(-2.9,0.325) 3(-2.9,-0.325) 4(-2.9,-0.975) 5(2.9,-0.975) 6(2.9,-0.325) 7(2.9,0.325) 8(2.9,0.975)
LT1371_DD_PAK_TO-8N
  rect 2.1x1 smd: 1(-6.4,3.81) 2(-6.4,2.54) 3(-6.4,1.27) 4(-6.4,0) 5(-6.4,-1.27) 6(-6.4,-2.54) 7(-6.4,-3.81)
  rect 8.2x10.6 smd: 8(3.35,0)
MICROUSB
  round 0 hole 0.6: (1.7,4.5) (5.7,4.5)
  oval 0.46x2.3 smd: 1(2.4,5.4) 2(3.05,5.4) 3(3.7,5.4) 4(4.35,5.4) 5(5,5.4)
  oval 1.9x0.8 smd rot 89.7: 6(6.525,2.6) 7(0.875,2.6)
MT48LC16M16A275_TSOP-54N
  oval 1.4x0.6 smd: 1(-5.65,10.4) 2(-5.65,9.6) 3(-5.65,8.8) 4(-5.65,8) 5(-5.65,7.2) 6(-5.65,6.4) 7(-5.65,5.6) 8(-5.65,4.8) 9(-5.65,4) 10(-5.65,3.2) 11(-5.65,2.4) 12(-5.65,1.6) 13(-5.65,0.8) 14(-5.65,0) 15(-5.65,-0.8) 16(-5.65,-1.6) 17(-5.65,-2.4) 18(-5.65,-3.2) 19(-5.65,-4) 20(-5.65,-4.8) 21(-5.65,-5.6) 22(-5.65,-6.4) 23(-5.65,-7.2) 24(-5.65,-8) 25(-5.65,-8.8) 26(-5.65,-9.6) 27(-5.65,-10.4) 28(5.65,-10.4) 29(5.65,-9.6) 30(5.65,-8.8) 31(5.65,-8) 32(5.65,-7.2) 33(5.65,-6.4) 34(5.65,-5.6) 35(5.65,-4.8) 36(5.65,-4) 37(5.65,-3.2) 38(5.65,-2.4) 39(5.65,-1.6) 40(5.65,-0.8) 41(5.65,0) 42(5.65,0.8) 43(5.65,1.6) 44(5.65,2.4) 45(5.65,3.2) 46(5.65,4) 47(5.65,4.8) 48(5.65,5.6) 49(5.65,6.4) 50(5.65,7.2) 51(5.65,8) 52(5.65,8.8) 53(5.65,9.6) 54(5.65,10.4)
PTH_BUZZER_2PIN
  rect 3.3x3.3 hole 2.2: 1(-3.25,0)
  round 3.3 hole 2.2: 2(3.25,0)
PV_BAT_LOAD_CONNECTOR_2P_762
  round 2.55 hole 1.7: 1(-3.81,0) 2(3.81,0)
RCL_COM_1206
  rect 1x1.75 smd: 1(-1.55,0) 2(1.55,0)
RP_RESISTOR_ARRAY_0603-8N
  rect 0.85x0.65 smd: 1(-0.9,1.275) 4(-0.9,-1.275) 5(0.9,-1.275) 8(0.9,1.275)
  rect 0.85x0.5 smd: 2(-0.9,0.4) 3(-0.9,-0.4) 6(0.9,-0.4) 7(0.9,0.4)
SAMPLE_RESISTOR_2512
  rect 1.5x3.35 smd: 1(-2.85,0) 2(2.85,0)
SMA_1N4733_350_145
  rect 0.8x1.55 smd: 1(1.75,0) 2(-1.75,0)
SMA_1N4733_520_270
  rect 1.11x2.65 smd: 1(2.4,0) 2(-2.4,0)
SMD_8PIN_JACK
  oval 3.5x0.9 smd: 1(-1.27,7.62) 2(-1.27,5.08) 3(-1.27,2.54) 4(-1.27,0) 5(3.886,0) 6(3.886,2.54) 7(3.886,5.08) 8(3.886,7.62)
SMD_40PIN_JACK
  oval 3.5x0.9 smd: 1(3.861,-0.025) 2(3.861,2.515) 3(3.861,5.055) 4(3.861,7.595) 5(3.861,10.135) 6(3.861,12.675) 7(3.861,15.215) 8(3.861,17.755) 9(3.861,20.295) 10(3.861,22.835) 11(3.861,25.375) 12(3.861,27.915) 13(3.861,30.455) 14(3.861,32.995) 15(3.861,35.535) 16(3.861,38.075) 17(3.861,40.615) 18(3.861,43.155) 19(3.861,45.695) 20(3.861,48.235) 21(-1.27,0) 22(-1.27,2.54) 23(-1.27,5.08) 24(-1.27,7.62) 25(-1.27,10.16) 26(-1.27,12.7) 27(-1.27,15.24) 28(-1.27,17.78) 29(-1.27,20.32) 30(-1.27,22.86) 31(-1.27,25.4) 32(-1.27,27.94) 33(-1.27,30.48) 34(-1.27,33.02) 35(-1.27,35.56) 36(-1.27,38.1) 37(-1.27,40.64) 38(-1.27,43.18) 39(-1.27,45.72) 40(-1.27,48.26)
SMD_AL_CAP_100X102
  rect 4.1x2.1 smd: 1(-4.4,0) 2(4.4,0)
SS8050_SOT23-3-3N
  rect 1x0.6 smd: 1(-1.15,0.95) 2(-1.15,-0.95) 3(1.15,0)
STM32C8T6QFP-48N
  rect 1.5x0.3 smd: 1(-4.25,2.75) 2(-4.25,2.25) 3(-4.25,1.75) 4(-4.25,1.25) 5(-4.25,0.75) 6(-4.25,0.25) 7(-4.25,-0.25) 8(-4.25,-0.75) 9(-4.25,-1.25) 10(-4.25,-1.75) 11(-4.25,-2.25) 12(-4.25,-2.75) 25(4.25,-2.75) 26(4.25,-2.25) 27(4.25,-1.75) 28(4.25,-1.25) 29(4.25,-0.75) 30(4.25,-0.25) 31(4.25,0.25) 32(4.25,0.75) 33(4.25,1.25) 34(4.25,1.75) 35(4.25,2.25) 36(4.25,2.75)
  rect 0.3x1.5 smd: 13(-2.75,-4.25) 14(-2.25,-4.25) 15(-1.75,-4.25) 16(-1.25,-4.25) 17(-0.75,-4.25) 18(-0.25,-4.25) 19(0.25,-4.25) 20(0.75,-4.25) 21(1.25,-4.25) 22(1.75,-4.25) 23(2.25,-4.25) 24(2.75,-4.25) 37(2.75,4.25) 38(2.25,4.25) 39(1.75,4.25) 40(1.25,4.25) 41(0.75,4.25) 42(0.25,4.25) 43(-0.25,4.25) 44(-0.75,4.25) 45(-1.25,4.25) 46(-1.75,4.25) 47(-2.25,4.25) 48(-2.75,4.25)
SWITCH_6PIN
  rrect 1.1x2 smd: 1(2.083,4.521) 2(4.583,4.521) 3(7.083,4.521) 4(7.083,-0.979) 5(4.583,-0.979) 6(2.083,-0.979)
SY7208_SOT23-6-6N
  rect 1.15x0.6 smd: 1(-1.35,0.95) 2(-1.35,0) 3(-1.35,-0.95) 4(1.35,-0.95) 5(1.35,0) 6(1.35,0.95)
TCAP_PO_1206
  rect 1.3x1.75 smd: 1(-1.4,0) 2(1.4,0)
TCAP_PO_6032
  rect 2.8x2.25 smd: 1(-2.15,0) 2(2.15,0)
TESTPOINT120
  round 1.2 smd: 1(0,0)
TPS73150SOT23_5_FINAL
  rect 1.1x0.6 smd: 1(-1.3,0.95) 2(-1.3,0) 3(-1.3,-0.95) 4(1.3,-0.95) 5(1.3,0.95)
YSO751SR_50MHZ_SMD-7050-4N
  rect 1.6x1.6 smd: 1(-2.05,3.05) 2(-2.05,-3.05) 3(2.05,-3.05) 4(2.05,3.05)

## Nets
6V_OUT: CP2.1 LP1.2 RP1.1 RPM4.2 RPM6.2 TEST_POINT23.1 U22.32 U22.33
GND: CA1.1 CA2.1 J2.5 J2.6 J2.7
VINT: U22.26 U22.27
ADC_BAT_CS: P1.74 TEST_POINT31.1 U11.1
ADC_BAT_DIN: P1.77 TEST_POINT30.1 U11.6
ADC_BAT_DOUT: P1.76 TEST_POINT28.1 U11.7
ADC_BAT_SCLK: P1.75 TEST_POINT29.1 U11.8
ADC_LOAD_CS: P1.124 U17.1
ADC_LOAD_DIN: P1.127 U17.6
ADC_LOAD_DOUT: P1.126 U17.7
ADC_LOAD_SCLK: P1.125 U17.8
ADC_PV_CS: P1.50 U9.1
ADC_PV_DIN: P1.53 U9.6
ADC_PV_DOUT: P1.52 U9.7
ADC_PV_SCLK: P1.51 U9.8
AMP_0V: CAXP1.2 CAXP2.2 CAXP3.2 CAXP4.1 CAXP5.2 CAXP6.1 CAXP7.1 CAXP8.2 CAXP9.2 CAXP10.2 CAXP11.2 CAXP12.2 CAXP13.2 CAXP14.2 CAXP15.2 CAXP17.2 CAXP19.1 CAXP20.1 CAXP21.1 CPVS10.2 CPVS11.1 CPVS12.1 CPVS13.2 RBS15.1 RLS15.1 RPM3.1 RPM10.2 RPM11.2 RPM13.2 RPVS12.2 RPVS15.1 SW1.1 SW2.1 U7.2 U9.3 U20.2 U22.9 U22.16 U22.49
AMP_BAT_VCC: CBS1.1 CBS3.2 CBS5.1 CBS10.1 CBS11.2 CBS12.2 CBS13.2 RBS11.1 RBS16.1 U2.2 U4.8(VCC) U6.5(OUT) U8.6 U11.2(VA)
AMP_BAT_VEE: CBS1.2 CBS2.2 CBS3.1 CBS4.2 CBS5.2 CBS6.2 CBS7.2 CBS8.2 CBS9.2 CBS10.2 CBS11.1 CBS12.1 CBS13.1 CBS14.1 DBS1.1 DBS2.1 RBS1.1 RBS2.1 RBS12.2 RBS15.2 U2.4 U4.4 U6.2 U8.2 U11.3 U12.4
AMP_LOAD_VCC: CLS1.1 CLS2.2 CLS4.1 CLS10.1 CLS11.2 CLS12.2 CLS13.2 RLS11.1 RLS16.1 U13.2 U14.8(VCC) U15.6 U16.5(OUT) U17.2(VA)
AMP_LOAD_VEE: CLS1.2 CLS2.1 CLS3.2 CLS4.2 CLS5.2 CLS6.2 CLS7.2 CLS8.2 CLS9.2 CLS10.2 CLS11.1 CLS12.1 CLS13.1 CLS14.1 DLS1.1 DLS2.1 RLS1.1 RLS2.1 RLS12.2 RLS15.2 U13.4 U14.4 U15.2 U16.2 U17.3 U18.4
AMP_PV_VCC: CPVS1.1 CPVS2.2 CPVS4.1 CPVS10.1 CPVS11.2 CPVS12.2 CPVS13.1 RPVS11.1 RPVS16.1 U1.2 U3.8(VCC) U5.5(OUT) U7.6 U9.2(VA)
AMP_PV_VEE: CPVS1.2 CPVS2.1 CPVS3.2 CPVS4.2 CPVS5.2 CPVS6.2 CPVS7.2 CPVS8.2 CPVS9.2 CPVS14.1 DPVS1.1 DPVS2.1 RPVS1.1 RPVS2.1 RPVS15.2 U1.4 U3.4 U5.2 U10.4
APS: CAXP16.2 RPM9.2 U22.21 U22.29
ARM_+3.3V: CA4.2 CA5.1 CA7.1 CA8.1 CA9.1 CA10.1 CA11.1 FB4.2 J1.7 J1.8 J3.5 RA1.2 RA2.2 RA3.2 U19.1 U19.9 U19.24 U19.36 U19.48
ARM_CONFIG_DONE: J8.7 U19.13
ARM_DATA0: J8.11 U19.15
ARM_DLCK: J8.13 U19.12
ARM_GND: BUTTON1.2 BUTTON2.1 BUTTON3.2 CA3.1 CA4.1 CA5.2 CA6.1 CA7.2 CA8.2 CA9.2 CA10.2 CA11.2 J1.3 J1.4 J3.6 RA5.1 RPM13.1 U19.8 U19.23 U19.35 U19.47(VSS_3)
ARM_KEY0: BUTTON1.1 U19.41
ARM_KEY1: BUTTON2.2 U19.42
ARM_LED1: DLA1.1(CATHODE) U19.43
ARM_LED2: DLA2.1(CATHODE) U19.45
ARM_MSEL2: RF7.1 U19.16
ARM_NCONFIG: J8.9 U19.14
ARM_NSTATUS: J8.15 U19.11
ARM_RXD: P1.86 TEST_POINT17.1 U19.22
ARM_SPI_MISO: P1.114 TEST_POINT20.1 U19.27
ARM_SPI_MOSI: P1.115 TEST_POINT21.1 U19.28
ARM_SPI_NSS: P1.112 TEST_POINT18.1 U19.25
ARM_SPI_SCK: P1.113 TEST_POINT19.1 U19.26
ARM_TXD: P1.87 TEST_POINT16.1 U19.21
ASDO: J8.39 J8.40 P1.6
AXP_AGND: CAXP16.1 CAXP18.1 RPM8.1 RPM12.2 U22.22
BAT_1V_REF: CBS14.2 RBS4.1 RBS8.1 RBS16.2 TEST_POINT6.1 U12.8
BAT_2.5VREF: CBS4.1 RBS10.1 RBS13.2 TEST_POINT2.1 U2.6(VOUT)
BAT_I-: CBAT1.1 CBAT2.1 CMDA1.1 CMDA2.1 CMDB1.1 CMDB2.1 CP5.1 CP6.1 LMDA1.1 LMDB1.1 PV_BAT_L1.1 RBS7.1 RBS17.2 RBS18.2 RP3.1 U8.1 U21.2 U23.5 U24.7
BAT_I-_AD: RBS9.1 RBS14.1 TEST_POINT10.1 U11.5
BAT_V_I+: J7.1 RBS6.1 RBS17.1 RBS18.1 U8.8
BAT_V_I+_AD: RBS3.1 TEST_POINT9.1 U4.1 U11.4
BELL: P1.68 RF19.1
C1: DID3.2(K) MID1.1 RID1.1 U31.6
C2: RID3.1 U31.3
CB: RID2.2 U31.2 U31.5
CLK_1: P1.23 RF22.2
CONFIG_DONE: J8.27 J8.28 P1.92
CORE_+1.2V: CF13.1 CF14.1 CF15.1 CF16.1 CF17.1 CF18.1 CF19.1 CF20.1 CF21.2 CF22.1 CF29.1 CF38.1 FB5.2 LED1.2V1.2 LF1.1 LF7.1 P1.5 P1.29 P1.45 P1.61 P1.78 P1.102 P1.116 P1.134
CORE_+2.5V: CF23.2 CF24.1 CF32.1 CF41.1 FB6.2 J8.6 J9.4 LED2.5V1.2 LF2.1 LF6.1 RF6.1 RF9.1 RF11.1
CORE_+3.3V: CF1.1 CF2.1 CF3.1 CF4.1 CF5.1 CF6.1 CF7.1 CF8.1 CF9.1 CF10.1 CF11.1 CF12.1 CF25.1 CF26.1 CF27.2 CF28.2 CF35.1 FB7.2 J10.4 LED3.3V1.2 LF5.1 P1.17 P1.26 P1.40 P1.47 P1.56 P1.62 P1.81 P1.93 P1.117 P1.122 P1.130 P1.139 RF1.1 RF2.1 RF14.1 RF15.1 RF16.1 RF17.1 RF18.1 RF20.1 RF21.1 RPKEY1.1 RPKEY1.2 RPKEY1.3 RPKEY1.4(R4_1) U25.3 U25.7(VCC3) U25.8 U26.1 U26.3 U26.9 U26.14 U26.27 U26.43 U26.49 U28.1
CRTSTAL_GND: CF36.2 CF37.2 LF8.2 Y2.2
DATA0: J8.31 J8.32 P1.13
DCLK: J8.33 J8.34 P1.12
DIODE_MOS_DRIVER_H: CID1.2 CID2.2 CMDB3.1 DID1.1 DID2.1 DMDB1.2(CATHODE) RID2.1 RMDB1.2 TEST_POINT27.1
DIODE_MOS_DRIVER_L: CBAT1.2 CBAT2.2 CID1.1 CID2.1 CMDA1.2 CMDA2.2 CMDA3.2 CMDB1.2 CMDB2.2 CMDB3.2 CMDB5.2 CMDR_F4.1 CP2.2 CP4.2 CP5.2 CP6.2 CP7.2 CPV1.2 CPV2.2 CTR_F3.2 CTR_F4.2 DP1.1 J5.2(-) J7.2(-) MF2.3(SOURCE) RMDA2.1 RMDB2.1 RMDB3.1 RMDR_B5.1 RMDR_F5.1 RP2.2 RP4.2 RP5.2 RPM10.1 RPM12.1 RTR_F6.2 U21.7 U23.2 U24.4 U24.8 U29.2
DS_A: P1.137 RPSEG2.1
DS_B: P1.138 RPSEG2.2
DS_C: P1.58 RPSEG2.3
DS_D: P1.59 RPSEG2.4(R4_1)
DS_DP: P1.67 RPSEG1.4(R4_1)
DS_E: P1.60 RPSEG1.1
DS_EN1: P1.132 RPSEG3.1
DS_EN2: P1.133 RPSEG3.2
DS_EN3: P1.135 RPSEG3.3
DS_EN4: P1.136 RPSEG3.4(R4_1)
DS_F: P1.64 RPSEG1.2
DS_G: P1.66 RPSEG1.3
EXT_CLK: J3.1 U19.29
EXTEN: TEST_POINT25.1 U20.4 U22.20 U23.4 U24.6
FLAS_ASDI: J8.20 U25.5
FLASH_CONFIG_DONE: J8.8 RF4.1
FLASH_DATA0: J8.12 U25.2
FLASH_DCLK: J8.14 U25.6
FLASH_NCONFIG: J8.10 RF5.1
FLASH_NCS: J8.18 U25.1
FLASH_NSTATUS: J8.16 RF3.1
FPGA_GND: CF1.2 CF2.2 CF3.2 CF4.2 CF5.2 CF6.2 CF7.2 CF8.2 CF9.2 CF10.2 CF11.2 CF12.2 CF13.2 CF14.2 CF15.2 CF16.2 CF17.2 CF18.2 CF19.2 CF20.2 CF21.1 CF22.2 CF23.1 CF24.2 CF25.2 CF26.2 CF27.1 CF28.1 CF29.2 CF32.2 CF35.2 CF38.2 CF41.2 J8.4 J8.5 J9.2 J9.10 J10.5 KEYF1.1 KEYF2.1 KEYF3.1 KEYF4.1 LF3.1 LF4.1 LF8.1 LF9.1 LF10.1 P1.4 P1.19 P1.21 P1.22 P1.27 P1.41 P1.48 P1.57 P1.63 P1.79 P1.82 P1.94 P1.95 P1.118 P1.123 P1.131 P1.140 P1.145 QF1.3(E) RF3.2 RF4.2 RF5.2 RF8.1 RF10.2 RF12.2 RF13.2 RPM11.1 U25.4 U26.6 U26.12 U26.28 U26.41 U26.46 U26.52 U26.54
FPGA_KEY1: KEYF1.2 P1.91 RPKEY1.8
FPGA_KEY2: KEYF2.2 P1.90 RPKEY1.7
FPGA_KEY3: KEYF3.2 P1.89 RPKEY1.6
FPGA_KEY4: KEYF4.2 P1.88 RPKEY1.5
FPGA_LED1: DLF1.1(CATHODE) P1.141
FPGA_LED2: DLF2.1(CATHODE) P1.142
FPGA_RXD: J10.3 P1.54
FPGA_TXD: J10.6 P1.55
IPS_5V_BUS: FB1.1 FB2.1 FB3.1 RPM1.2 RPM4.1 RPM5.1 TEST_POINT22.1
IPSOUT: CAXP1.1 CAXP2.1 CAXP5.1 CAXP6.2 CAXP8.1 CAXP11.1 CAXP14.1 CAXP17.1 LAXP1.1 RPM5.2 RPM9.1 SW1.3 SW2.3 U20.5 U22.7 U22.13 U22.14 U22.34 U22.35 U22.40
J_TCK: J9.1 P1.16 RF8.2
J_TDI: J9.9 P1.15 RF11.2
J_TDO: J9.3 P1.20
J_TMS: J9.5 P1.18 RF9.2
LDO1: CAXP21.2 J4.1 J4.8 U22.28
LDO3: CAXP20.2 J4.2 J4.7 U22.41
LDO4: CAXP19.2 J4.3 J4.6 U22.11
LOAD_1V_REF: CLS14.2 RLS5.1 RLS8.1 RLS16.2 TEST_POINT13.1 U18.8
LOAD_I-: J6.1 RLS7.1 RLS17.2 RLS18.2 U15.1
LOAD_I-_AD: RLS9.1 RLS14.1 TEST_POINT15.1 U17.5
LOAD_V2.5REF: CLS5.1 RLS10.1 RLS13.2 TEST_POINT11.1 U13.6(VOUT)
LOAD_V_I+: CLOAD1.1 CLOAD2.1 CTR_B1.1 CTR_B2.1 MB1.2 RLS6.1 RLS17.1 RLS18.1 U15.8
LOAD_V_I+_AD: RLS3.1 TEST_POINT14.1 U14.1 U17.4
MSEL1: J8.25 J8.26 P1.96
MSEL2: J8.23 J8.24 P1.97
NCONFIG: J8.29 J8.30 P1.14
NCS: J8.37 J8.38
NSTATUS: J8.35 J8.36 P1.9
P24_EXTENCLK: J10.1 P1.24
P25_EXTENCLK: J10.2 P1.25
P128_IO_DN: J10.8 P1.128
P129_IO_DP: J10.7 P1.129
PA0: J3.7 U19.10
PA7: J3.2 U19.17
PA9: J3.3 U19.30
PA15: J3.4 U19.38
PB9: J3.8 U19.46
PLL1_A_+2.5V: CF33.1 CF34.1 LF2.2 P1.35
PLL1_D_+1.2V: CF30.1 CF31.1 LF1.2 P1.37
PLL1_GND: CF30.2 CF31.2 CF33.2 CF34.2 LF3.2 LF4.2 P1.36
PLL2_A_+2.5V: CF42.1 CF43.1 LF6.2 P1.107
PLL2_D_+1.2V: CF39.1 CF40.1 LF7.2 P1.109
PLL2_GND: CF39.2 CF40.2 CF42.2 CF43.2 LF9.2 LF10.2 P1.108(GNDA2)
PMIC_GPIO3: U19.40 U22.3
PMIC_IRQ: RA3.1 U19.20 U22.48
PMIC_SCK: RA2.1 U19.19 U22.2
PMIC_SDA: RA1.1 U19.18 U22.1
PMIC_STATE: U19.39 U22.25
PV_1V_REF: CPVS14.2 RPVS5.1 RPVS8.1 RPVS16.2 TEST_POINT5.1 U10.8
PV_2.5VREF: CPVS5.1 RPVS10.1 RPVS13.2 TEST_POINT1.1 U1.6(VOUT)
PV_I-: CPV1.1 CPV2.1 DID4.2(CATHODE) DID5.1 MID1.3(S) RPVS7.1 RPVS17.2 RPVS18.2 U7.1 U31.1
PV_I-_AD: RPVS9.1 RPVS14.1 TEST_POINT8.1 U9.5
PV_V_I+: J5.1 RPVS6.1 RPVS17.1 RPVS18.1 U7.8
PV_V_I+_AD: RPVS3.1 TEST_POINT7.1 U3.1 U9.4
Q1/2_SD: P1.143 RMDR_F3.1 TEST_POINT33.1
Q1_HIGH_SIDE: RMDR_F1.2 RTR_F1.1 RTR_F2.1
Q1_PWM: P1.69 RMDR_F2.1 TEST_POINT34.1
Q1_VS: CMDR_F1.2 CMDR_F2.1 MF1.3(SOURCE) MF2.2 PV_BAT_L1.2 RTR_F3.2 T1.1 T1.2 T1.3 U29.6
Q2_LOW_SIDE: RMDR_F6.2 RTR_F4.1 RTR_F5.1
Q2_PWM: P1.70 RMDR_F4.1 TEST_POINT35.1
Q3/4_SD: P1.144 RMDR_B3.1 TEST_POINT32.1
Q3_HIGH_SIDE: RMDR_B1.2 RTR_B1.1 RTR_B2.1
Q3_PWM: P1.71 RMDR_B2.1 TEST_POINT36.1
Q3_VS: CMDR_B1.2 CMDR_B2.1 MB1.3(SOURCE) MB2.2 RTR_B3.2 T1.12 T1.13 T1.14 U30.6
Q4_LOW_SIDE: RMDR_B6.2 RTR_B4.1 RTR_B5.1
Q4_PWM: P1.72 RMDR_B4.1 TEST_POINT37.1
Q4_VS: CLOAD1.2 CLOAD2.2 CMDR_B4.1 CTR_B3.2 CTR_B4.2 J6.2(-) MB2.3(SOURCE) RTR_B6.2 U30.2
SDRAM_A0: P1.111 U26.23
SDRAM_A1: P1.119 U26.24
SDRAM_A2: P1.120 U26.25
SDRAM_A3: P1.121 U26.26
SDRAM_A4: P1.103 U26.29
SDRAM_A5: P1.101 U26.30
SDRAM_A6: P1.100 U26.31
SDRAM_A7: P1.99 U26.32
SDRAM_A8: P1.98 U26.33
SDRAM_A9: P1.85 U26.34
SDRAM_A10: P1.110 U26.22
SDRAM_A11: P1.84 U26.35
SDRAM_A12: P1.83 U26.36
SDRAM_BA0: P1.104 U26.20
SDRAM_BA1: P1.106 U26.21
SDRAM_CAS_N: P1.32 RF17.2 U26.17
SDRAM_CKE: P1.80 RF14.2 U26.37
SDRAM_CLK: P1.73 U26.38
SDRAM_CS_N: P1.105 RF15.2 U26.19
SDRAM_DQ0: P1.2 U26.2
SDRAM_DQ1: P1.1 U26.4
SDRAM_DQ2: P1.7 U26.5
SDRAM_DQ3: P1.3 U26.7
SDRAM_DQ4: P1.8 U26.8
SDRAM_DQ5: P1.10 U26.10
SDRAM_DQ6: P1.11 U26.11
SDRAM_DQ7: P1.28 U26.13
SDRAM_DQ8: P1.49 U26.42
SDRAM_DQ9: P1.46 U26.44
SDRAM_DQ10: P1.44 U26.45
SDRAM_DQ11: P1.43 U26.47
SDRAM_DQ12: P1.42 U26.48
SDRAM_DQ13: P1.39 U26.50
SDRAM_DQ14: P1.38 U26.51
SDRAM_DQ15: P1.34 U26.53
SDRAM_DQMH: P1.65 U26.39
SDRAM_DQML: P1.30 U26.15
SDRAM_RAS_N: P1.33 RF18.2 U26.18
SDRAM_WE_N: P1.31 RF16.2 U26.16(WE)
SOURCE_+1.2V: CAXP4.2 CAXP7.2 FB5.1 LAXP2.2 U22.10
SOURCE_+2.5V: CAXP15.1 FB6.1 U22.12
SOURCE_+3.3V: CAXP12.1 CAXP13.1 FB4.1 FB7.1 FB8.1 FB9.1 LAXP3.2 U22.17
SWCLK: J1.6 U19.37
SWDIO: J1.2 U19.34
TPS54331_VFB: RP1.2 RP2.1 U21.5(VSENSE)
USB_5V: CA3.2 J2.1(VBUS) RPM7.2 U22.31
USB_CON: RA4.2 U19.31
USB_DM: J2.2 U19.32
USB_DP: J2.3 RA4.1 U19.33
V_MOS_DRIVER_H: CMDA3.1 CMDR_B4.2 CMDR_F4.2 DMDA1.2(CATHODE) DMDR_B1.1 DMDR_F1.1 RMDA1.2 TEST_POINT24.1 U29.3 U30.3
XT_1: CA1.2 U19.5 Y1.1
XT_2: CA2.2 U19.6 Y1.2
N00439: CTR_F1.1 CTR_F2.1 DID5.2(K) MF1.2 MID1.2 U31.4(E2)
N00447: CTR_F1.2 CTR_F2.2 CTR_F3.1 CTR_F4.1 T1.5 T1.6 T1.7
N00533: CTR_B1.2 CTR_B2.2 CTR_B3.1 CTR_B4.1 T1.8 T1.9 T1.10
N21190: LED3.3V1.1(CATHODE) RF10.1
N21194: LED2.5V1.1(CATHODE) RF12.1
N21198: LED1.2V1.1(CATHODE) RF13.1
N36696: CF36.1 CF37.1 LF5.2 Y2.4
N167652: J8.3 QF1.2 RF6.2
N167690: QF1.1 RF7.2
N274813: CPVS6.1 DPVS1.2(K) RPVS5.2 RPVS6.2 U3.3
N274825: CPVS7.1 DPVS2.2(K) RPVS7.2 RPVS8.2 U3.5
N275613: RPVS2.2 RPVS3.2 U3.2
N275727: RPVS4.2 RPVS9.2 U3.7
N279293: RPVS1.2 RPVS4.1 U3.6
N280504: CBS6.1 DBS1.2(K) RBS4.2 RBS6.2 U4.3
N280508: CBS7.1 DBS2.2(K) RBS7.2 RBS8.2 U4.5
N280636: RBS1.2 RBS3.2 U4.2
N280666: RBS5.2 RBS9.2 U4.7
N281006: RBS2.2 RBS5.1 U4.6
N281753: CLS6.1 DLS1.2(K) RLS5.2 RLS6.2 U14.3
N281757: CLS7.1 DLS2.2(K) RLS7.2 RLS8.2 U14.5
N281885: RLS1.2 RLS3.2 U14.2
N281915: RLS4.2 RLS9.2 U14.7
N282255: RLS2.2 RLS4.1 U14.6
N343703: DID3.1 DID4.1
N346402: DID1.2(CATHODE) RID1.2
N346519: DID2.2(CATHODE) RID3.2
N444059: RLS10.2 RLS11.2 U15.7
N464099: RBS10.2 RBS11.2 U8.7
N464139: RPVS10.2 RPVS11.2 U7.7
N465826: CP1.1 DP1.2(CATHODE) LP1.1 U21.8
N465950: CP1.2 U21.1
N466058: CP3.1 CP4.1 U21.6
N466102: CP7.1 U21.4
N466194: CP3.2 RP5.1
N473304: RPVS12.1 RPVS13.1 U7.3(VREF2)
N474287: RBS12.1 RBS13.1 U8.3(VREF2)
N474953: RLS12.1 RLS13.1 U15.3(VREF2)
N483143: CPVS9.1 FB1.2 U5.1 U5.3
N486868: CPVS8.1 U5.4
N487219: CBS9.1 FB2.2 U6.1 U6.3
N487285: CBS8.1 U6.4
N488687: CLS9.1 FB3.2 U16.1 U16.3
N488753: CLS8.1 U16.4
N504555: CAXP9.1 RPM6.1
N504850: CAXP10.1 RPM7.1
N520069: LAXP3.1 U22.15
N520579: LAXP2.1 U22.8
N522356: CAXP18.2 U22.24(VREF)
N523014: RPM8.2 U22.23
N530026: SW1.2 U22.4
N530495: SW2.2 U22.6
N538709: DAXP1.1 LAXP1.2 U20.1
N538889: CAXP3.1 DAXP1.2(CATHODE) RPM1.1 RPM2.2
N539188: RPM2.1 RPM3.2 U20.3
N539988: TEST_POINT26.1 U22.47
N561385: RMDR_F2.2 U29.12
N561393: RMDR_B2.2 U30.12
N561461: RMDR_F4.2 U29.14
N561505: RMDR_B4.2 U30.14
N561533: RMDR_F1.1 U29.8
N561584: RMDR_F6.1 U29.1
N561634: CMDR_F1.1 CMDR_F2.2 DMDR_F1.2(CATHODE) U29.7
N562577: CMDR_F3.1 FB8.2 U29.11
N562678: CMDR_B3.1 FB9.2 U30.11
N562717: CMDR_B3.2 RMDR_B5.2 U30.15(VSS)
N563049: CMDR_F3.2 RMDR_F5.2 U29.15(VSS)
N563291: RMDR_B1.1 U30.8
N563303: CMDR_B1.1 CMDR_B2.2 DMDR_B1.2(CATHODE) U30.7
N563407: RMDR_B6.1 U30.1
N565162: DMDA1.1 LMDA1.2 U23.1
N565312: RMDA1.1 RMDA2.2 U23.3
N576441: DMDB1.1 LMDB1.2 U24.5(VSW)
N587293: DLF1.2 RF20.2
N587298: DLF2.2 RF21.2
N611780: BUTTON3.1 CA6.2 U19.7
N615151: RA5.2 U19.44
N668467: DLA1.2 RF1.2
N668517: DLA2.2 RF2.2
N710059: CMDB4.1 CMDB5.1 U24.1
N710321: RMDB1.1 RMDB2.2 U24.2
N715146: RP3.2 RP4.1 U21.3
N730669: RF22.1 Y2.3
N738130: DTR_F2.1 MF2.1 RTR_F5.2 RTR_F6.1
N738645: DTR_B1.1 MB1.1 RTR_B2.2 RTR_B3.1
N738858: DTR_B2.1 MB2.1 RTR_B5.2 RTR_B6.1
N739234: DTR_F1.1 MF1.1 RTR_F2.2 RTR_F3.1
N739244: DTR_F1.2(CATHODE) RTR_F1.2
N739261: DTR_F2.2(CATHODE) RTR_F4.2
N739689: DTR_B1.2(CATHODE) RTR_B1.2
N739783: DTR_B2.2(CATHODE) RTR_B4.2
N852127: RMDR_F3.2 U29.13
N852153: RMDR_B3.2 U30.13
N5503690: CLS3.1 U13.3
N5503870: TEST_POINT3.1 U1.5
N5506194: RPVS14.2 U7.5
N5512270: TEST_POINT4.1 U2.5
N5513850: CPVS3.1 U1.3
N5514650: CBS2.1 U2.3
N5515430: TEST_POINT12.1 U13.5
N5519434: RLS14.2 U15.5
N5529554: RBS14.2 U8.5
N6014180: RPSEG2.8 U27.11
N6014181: RPSEG2.7 U27.7
N6014182: RPSEG2.6 U27.4
N6014183: RPSEG1.8 U27.1
N6014184: RPSEG2.5 U27.2
N6014185: RPSEG1.7 U27.10
N6014186: RPSEG1.6 U27.5(G)
N6014187: RPSEG1.5 U27.3
N6014188: RPSEG3.8 U27.6
N6014189: RPSEG3.7 U27.8
N6024041: RF19.2 U28.2
N7100371: CMDB4.2 RMDB3.2
N60141810: RPSEG3.6 U27.9
N60141811: RPSEG3.5 U27.12

Pads without a net: J1 1 5 9 10; J2 4; J4 4 5; J8 1 2 17 19 21 22; J9 6 7 8; MB1 4; MB2 4; MF1 4; MF2 4; MID1 4; SW1 4 5 6; SW2 4 5 6; T1 4 11; U1 1 7 8; U2 1 7 8; U7 4; U8 4; U10 1 2 3 5 6 7; U12 1 2 3 5 6 7; U13 1 7 8; U15 4; U18 1 2 3 5 6 7; U19 2 3 4; U20 6; U22 5 18 19 30 36 37 38 39 42 43 44 45 46; U23 6; U24 3; U26 40; U29 4 5 9 10 16; U30 4 5 9 10 16; Y2 1
